# Altium PCB PCIE x1 MXM 3.1 Riser Basic.PCBDOC
Units mm, origin at the board's own origin, x right, y up, seen from the top; angles counter-clockwise.
Board outline 100.1 x 100.1 mm, 4 copper layers (TopLayer, InternalPlane1, InternalPlane2, BottomLayer); 3 components, 21 nets, 323 pads, 0 vias.
Unrouted connection lines stored in the file: 14.
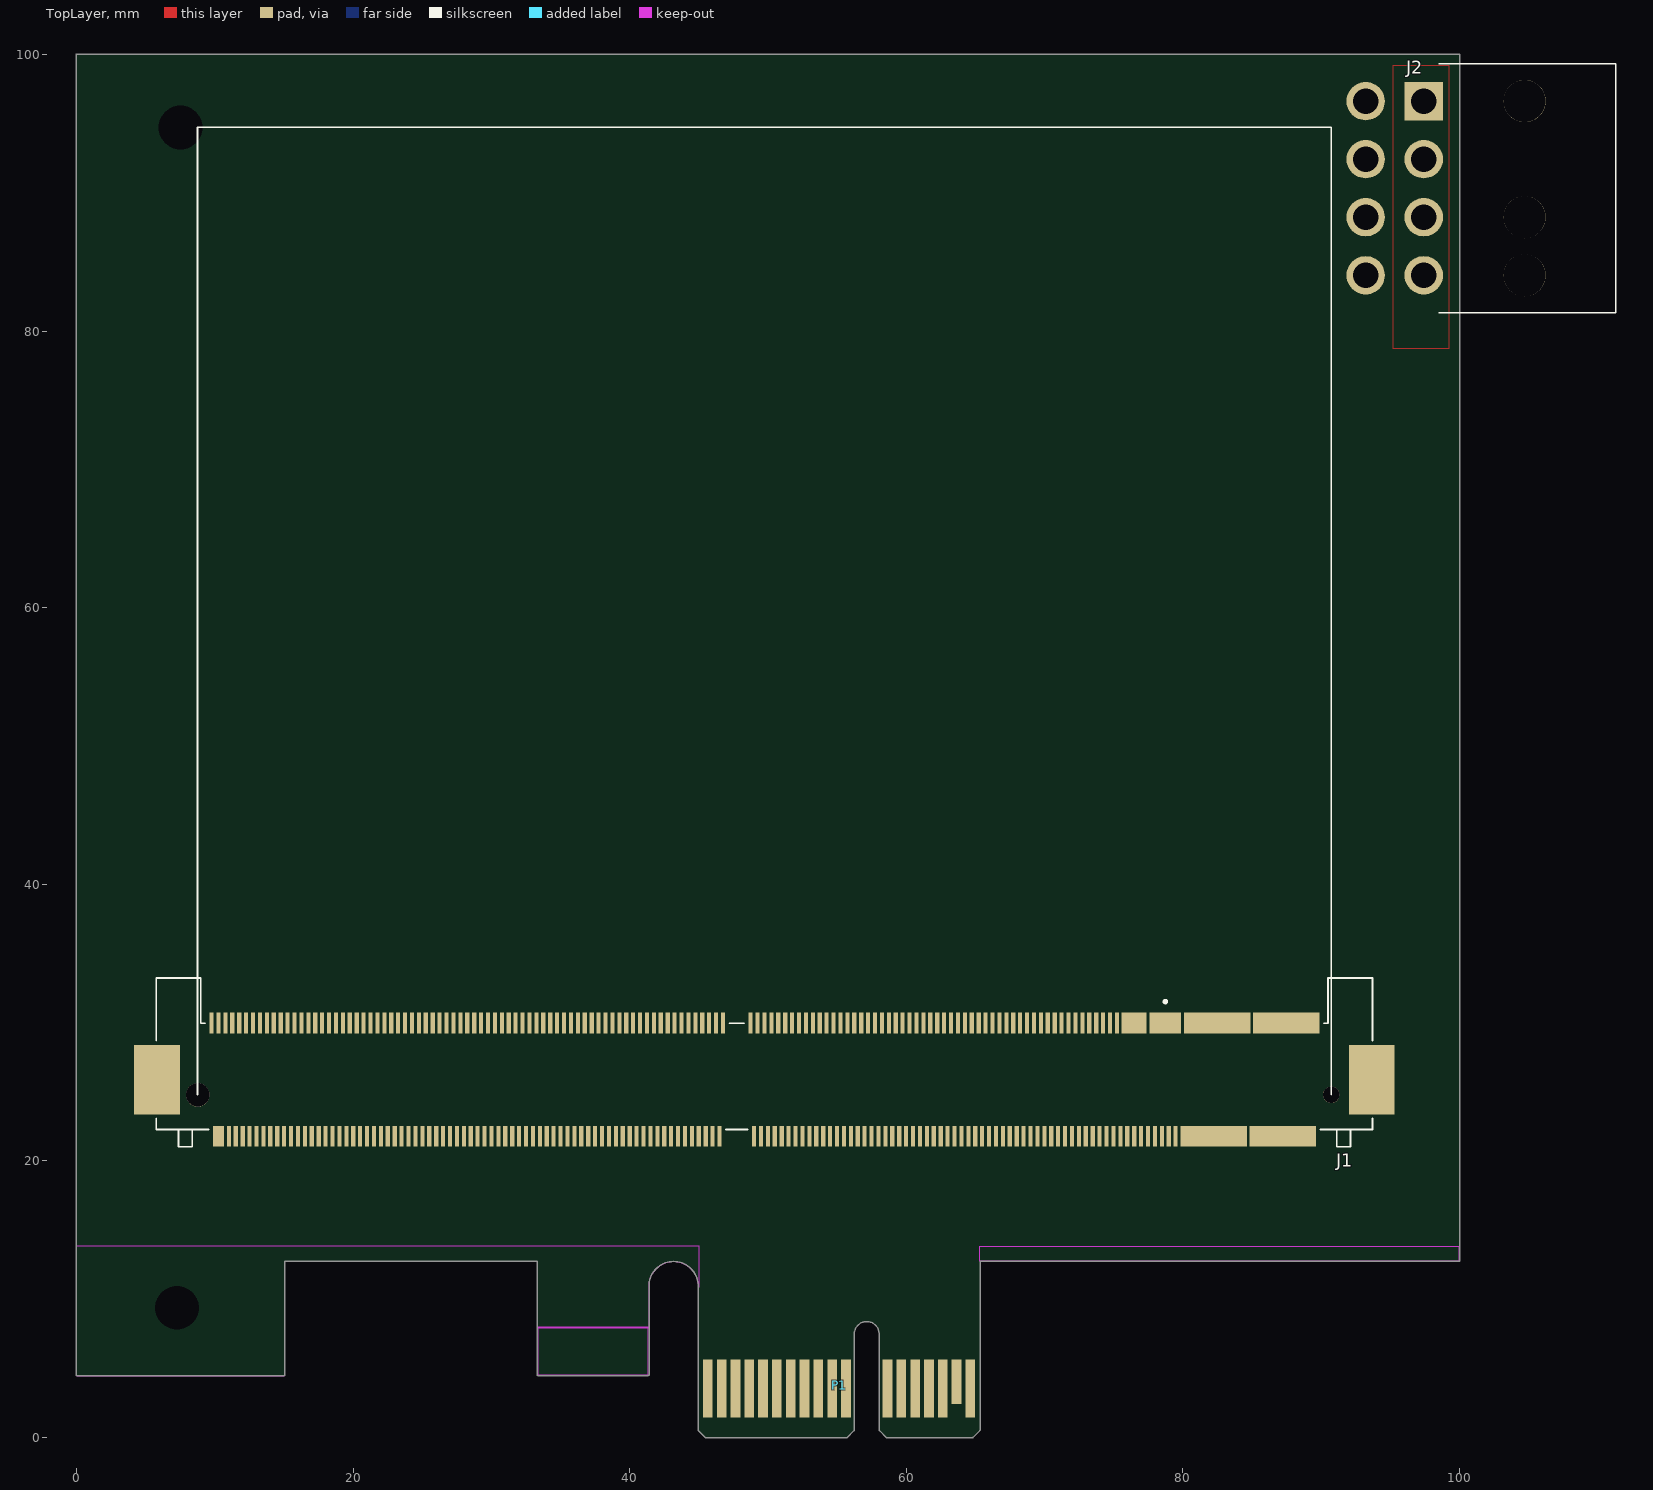
[diagram p0: TopLayer view]
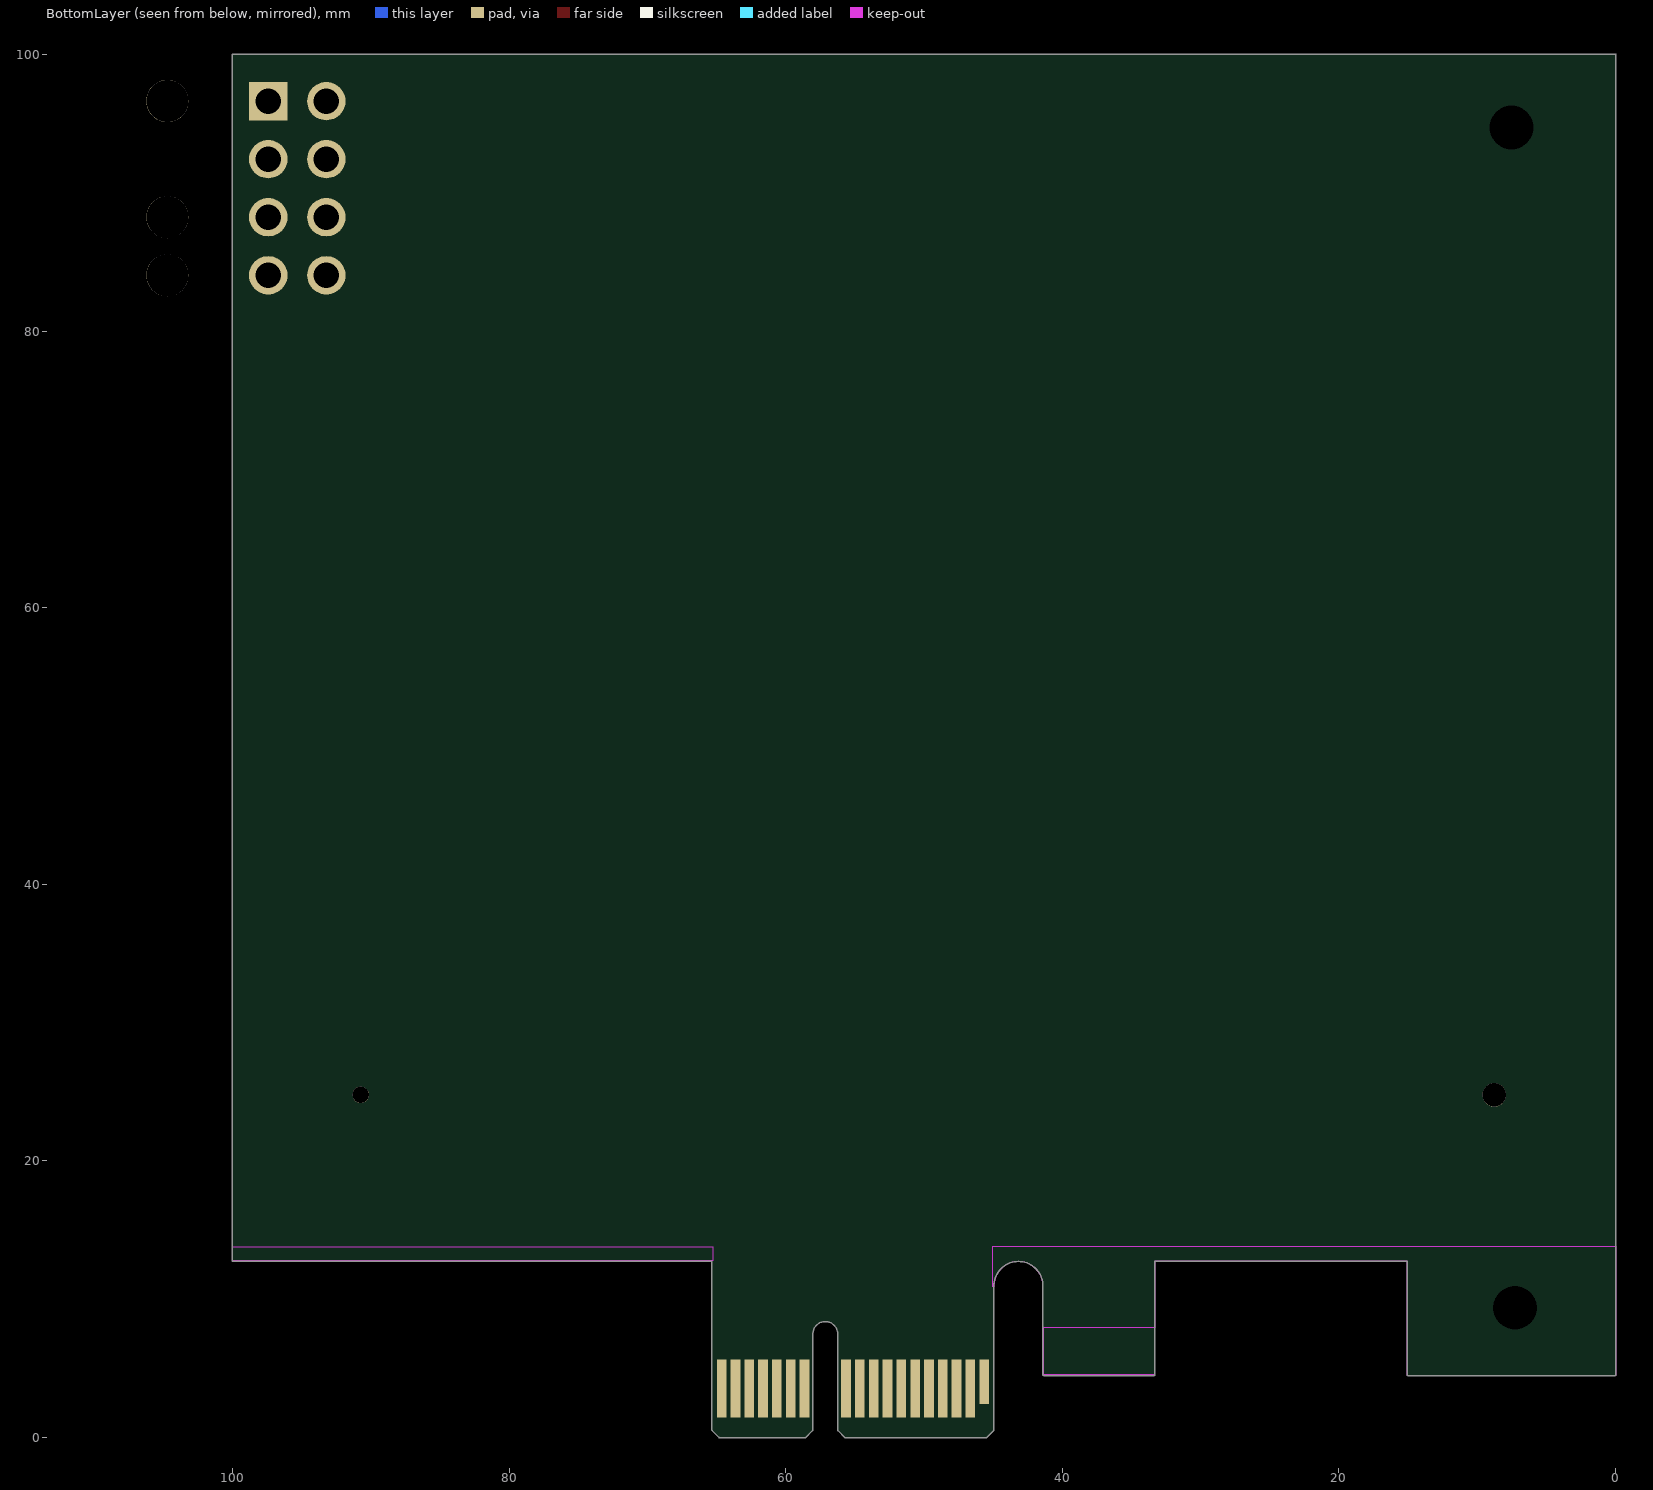
[diagram p1: BottomLayer view, seen from below]
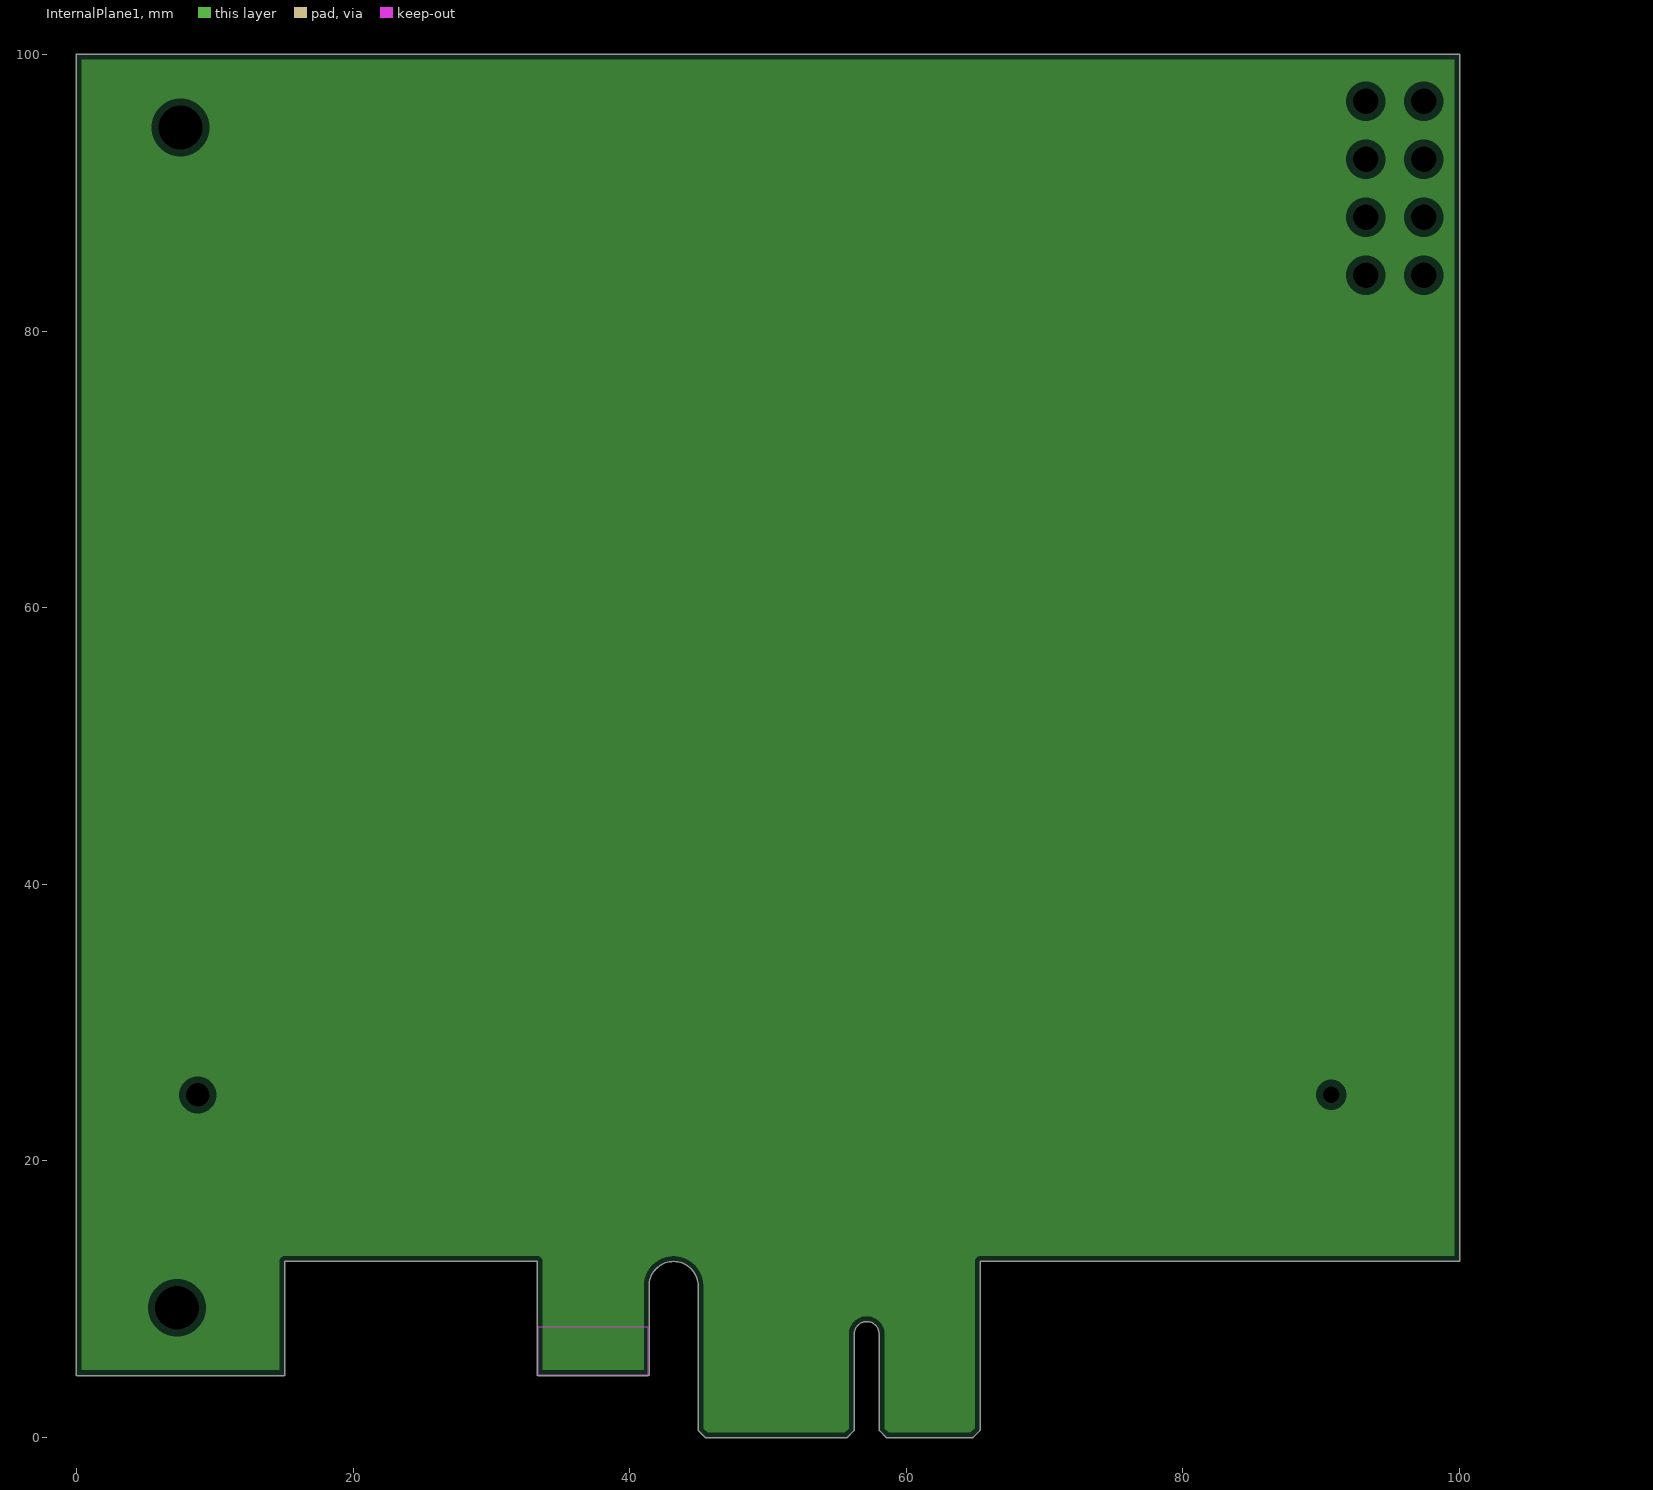
[diagram p2: InternalPlane1, clearances drawn from the general rule]
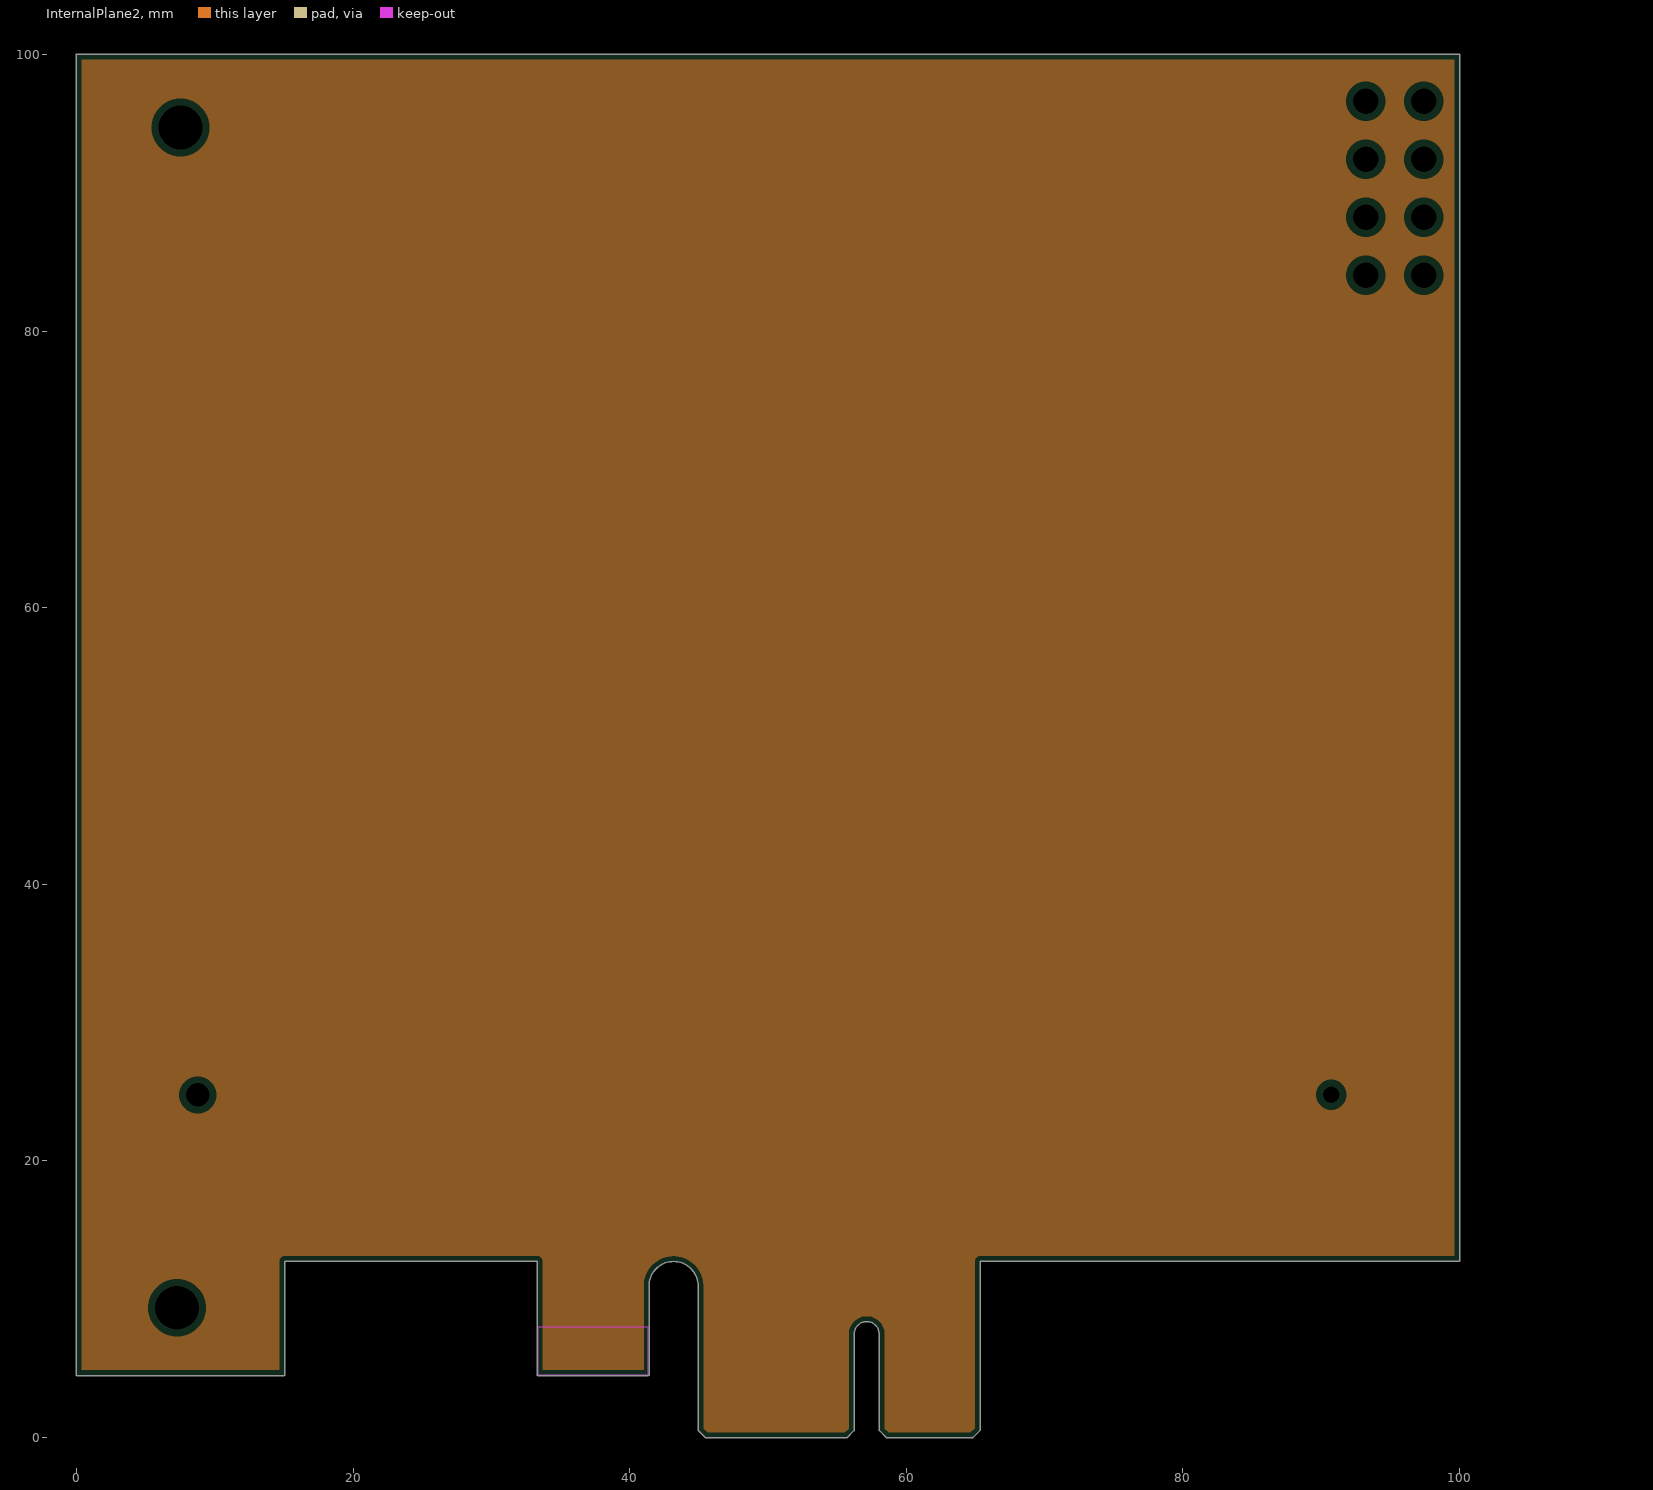
[diagram p3: InternalPlane2, clearances drawn from the general rule]

## Layer stack, top to bottom
TopSolder: solder mask 0.0102, Solder Resist, Dk 3.5
TopLayer: signal copper 0.0178
Dielectric1: core 0.32, FR-4, Dk 4.8
InternalPlane1: plane copper 0.0356
Dielectric2: prepreg 0.32, FR-4, Dk 4.8
InternalPlane2: plane copper 0.0356
Dielectric3: core 0.32, FR-4, Dk 4.8
BottomLayer: signal copper 0.0178
BottomSolder: solder mask 0.0102, Solder Resist, Dk 3.5

## Board outline
0,4.45 15,4.45 ccw(c15,4.5) 15.05,4.5 15.05,12.7 33.3,12.7 33.3,4.5 ccw(c33.35,4.5) 33.35,4.45 41.35,4.45 ccw(c41.35,4.5) 41.4,4.5 41.4,10.925 ccw(c41.35,10.925) 41.4,10.925 cw(c43.175,10.925) 44.95,10.925 ccw(c45,10.925) 44.95,10.924 44.95,0.5 ccw(c45,0.5) 44.965,0.464 44.964,0.464 45.464,-0.036 45.464,-0.035 ccw(c45.5,0) 45.5,-0.05 55.7,-0.05 ccw(c55.7,0) 55.736,-0.035 55.736,-0.036 56.236,0.464 56.235,0.464 ccw(c56.2,0.5) 56.25,0.5 56.25,7.45 cw(c57.15,7.45) 58.05,7.45 58.05,0.5 ccw(c58.1,0.5) 58.065,0.464 58.064,0.464 58.564,-0.036 58.564,-0.035 ccw(c58.6,0) 58.6,-0.05 64.8,-0.05 ccw(c64.8,0) 64.836,-0.035 64.836,-0.036 65.336,0.464 65.335,0.464 ccw(c65.3,0.5) 65.35,0.5 65.35,12.7 100,12.7 ccw(c100,12.75) 100.05,12.75 100.05,100 ccw(c100,100) 100,100.05 0,100.05 ccw(c0,100) -0.05,100 -0.05,4.5 ccw(c0,4.5)

## Design rules (kind name [scope] priority, off if disabled: settings)
Clearance [All] p1: gap=0.254 ignorepadtopadclearanceinfootprint=FALSE except(0: Arc-Hole Track-Hole SMDPad-Hole THPad-Hole Via-Hole Fill-Hole Poly-Hole Region-Hole Text-Hole)
DiffPairsRouting [All] p1: maxlimit=0.254 minlimit=0.254 mostfreqgap=0.254 toplayer_minwidth=0.381 toplayer_maxwidth=0.381 toplayer_prefwidth=0.381 bottomlayer_minwidth=0.381 bottomlayer_maxwidth=0.381 bottomlayer_prefwidth=0.381 maxuncoupledlength=12.7
FabricationTestPointUsage TestPointUsage [All] p1: valid=0 allowmultiple=FALSE
FabricationTestpoint Testpoint [All] p1: side=3 testpointundercomponent=TRUE minsize=1.016 maxsize=2.54 preferedsize=1.524 minholesize=0.508 maxholesize=1.016 preferedholesize=0.813 testpointgrid=0.025 allowsidetop=TRUE allowsidebottom=TRUE usegrid=TRUE gridtolerance=0
Height "PCI Express, Page 84, \"Component Height Constraints\" for solder side" [OnBottomLayer] p1: minheight=0 maxheight=2.67 prefheight=2.67
Height "PCI Express, Page 84, \"Component Height Constraints\" for component side" [OnTopLayer] p2: minheight=0 maxheight=14.47 prefheight=14.47
PlaneClearance [All] p1: clearance=0.5
PlaneConnect [All] p1: planeconnectstyle=Relief reliefexpansion=0.508 reliefentries=4 reliefconductorwidth=0.254 reliefairgap=0.254
PolygonConnect [All] p1: connectstyle=Relief reliefconductorwidth=0.254 reliefentries=4 polygonreliefangle="90 Angle" airgapwidth=0.254
RoutingVias [All] p1: holewidth=0.711 width=1.27 viastyle="Through Hole" minholewidth=0.711 minwidth=1.27 maxholewidth=0.711 maxwidth=1.27
SilkToSolderMaskClearance SilkscreenOverComponentPads [IsPad] p1: minsilkscreentomaskgap=0.254 clearancetoexposedcopper=TRUE
SolderMaskExpansion [All] p1: expansion=0 istentingtop=FALSE
Width [All] p1: maxlimit=0.254 minlimit=0.254 preferedwidth=0.254
23 further rules are at their usual default settings.

## Classes and differential pairs
component class U_CON_PCI_Express_X1_36PIN: P1
net class JTAG[1..5]: JTAG1 JTAG2 JTAG3 JTAG4 JTAG5
component class "Edge Connector": P1
differential pair PER0: +PER0_P -PER0_N
differential pair PET0: +PET0_P -PET0_N

## Components (designator, comment, footprint, x,y, rotation, side; value= is the part's Value field where it differs from the comment)
J1 "Comment" JAE_MM70-314-310B1-2-R300 47.75,24.75 r180 top
J2 "Comment" Molex_45586-8-Pin-PWR 101.963,90.325 r270 top
P1 "PCIeX1-GF-2D-1000-1K-O36" PCIeX1-GF-2D-1000-1K-O36 55.15,3.5 r0 top locked

## Footprints (in the part's own frame and the unit in brackets; to place one, negate y for a bottom-side part, rotate by r counter-clockwise, add the part's x,y. Pads: shape width x height; smd on the part's side, far side on the other; paste and mask are expansions set on the pad)
JAE_MM70-314-310B1-2-R300 [mm]
  rect 2.3x1.5 smd: 1(-31,-5.2)
  rect 0.3x1.5 smd: 2(-31.75,3) 4(-31.25,3) 6(-30.75,3) 8(-30.25,3) 10(-29.75,3) 12(-29.25,3) 14(-28.75,3) 16(-28.25,3) 18(-27.75,3) 19(-27.5,-5.2) 20(-27.25,3) 21(-27,-5.2) 22(-26.75,3) 23(-26.5,-5.2) 24(-26.25,3) 25(-26,-5.2) 26(-25.75,3) 27(-25.5,-5.2) 28(-25.25,3) 29(-25,-5.2) 30(-24.75,3) 31(-24.5,-5.2) 32(-24.25,3) 33(-24,-5.2) 34(-23.75,3) 35(-23.5,-5.2) 36(-23.25,3) 37(-23,-5.2) 38(-22.75,3) 39(-22.5,-5.2) 40(-22.25,3) 41(-22,-5.2) 42(-21.75,3) 43(-21.5,-5.2) 44(-21.25,3) 45(-21,-5.2) 46(-20.75,3) 47(-20.5,-5.2) 48(-20.25,3) 49(-20,-5.2) 50(-19.75,3) 51(-19.5,-5.2) 52(-19.25,3) 53(-19,-5.2) 54(-18.75,3) 55(-18.5,-5.2) 56(-18.25,3) 57(-18,-5.2) 58(-17.75,3) 59(-17.5,-5.2) 60(-17.25,3) 61(-17,-5.2) 62(-16.75,3) 63(-16.5,-5.2) 64(-16.25,3) 65(-16,-5.2) 66(-15.75,3) 67(-15.5,-5.2) 68(-15.25,3) 69(-15,-5.2) 70(-14.75,3) 71(-14.5,-5.2) 72(-14.25,3) 73(-14,-5.2) 74(-13.75,3) 75(-13.5,-5.2) 76(-13.25,3) 77(-13,-5.2) 78(-12.75,3) 79(-12.5,-5.2) 80(-12.25,3) 81(-12,-5.2) 82(-11.75,3) 83(-11.5,-5.2) 84(-11.25,3) 85(-11,-5.2) 86(-10.75,3) 87(-10.5,-5.2) 88(-10.25,3) 89(-10,-5.2) 90(-9.75,3) 91(-9.5,-5.2) 92(-9.25,3) 93(-9,-5.2) 94(-8.75,3) 95(-8.5,-5.2) 96(-8.25,3) 97(-8,-5.2) 98(-7.75,3) 99(-7.5,-5.2) 100(-7.25,3) 101(-7,-5.2) 102(-6.75,3) 103(-6.5,-5.2) 104(-6.25,3) 105(-6,-5.2) 106(-5.75,3) 107(-5.5,-5.2) 108(-5.25,3) 109(-5,-5.2) 110(-4.75,3) 111(-4.5,-5.2) 112(-4.25,3) 113(-4,-5.2) 114(-3.75,3) 115(-3.5,-5.2) 116(-3.25,3) 117(-3,-5.2) 118(-2.75,3) 119(-2.5,-5.2) 120(-2.25,3) 121(-2,-5.2) 122(-1.75,3) 123(-1.5,-5.2) 124(-1.25,3) 125(-1,-5.2) 133(1,-5.2) 134(1.25,3) 135(1.5,-5.2) 136(1.75,3) 137(2,-5.2) 138(2.25,3) 139(2.5,-5.2) 140(2.75,3) 141(3,-5.2) 142(3.25,3) 143(3.5,-5.2) 144(3.75,3) 145(4,-5.2) 146(4.25,3) 147(4.5,-5.2) 148(4.75,3) 149(5,-5.2) 150(5.25,3) 151(5.5,-5.2) 152(5.75,3) 153(6,-5.2) 154(6.25,3) 155(6.5,-5.2) 156(6.75,3) 157(7,-5.2) 158(7.25,3) 159(7.5,-5.2) 160(7.75,3) 161(8,-5.2) 162(8.25,3) 163(8.5,-5.2) 164(8.75,3) 165(9,-5.2) 166(9.25,3) 167(9.5,-5.2) 168(9.75,3) 169(10,-5.2) 170(10.25,3) 171(10.5,-5.2) 172(10.75,3) 173(11,-5.2) 174(11.25,3) 175(11.5,-5.2) 176(11.75,3) 177(12,-5.2) 178(12.25,3) 179(12.5,-5.2) 180(12.75,3) 181(13,-5.2) 182(13.25,3) 183(13.5,-5.2) 184(13.75,3) 185(14,-5.2) 186(14.25,3) 187(14.5,-5.2) 188(14.75,3) 189(15,-5.2) 190(15.25,3) 191(15.5,-5.2) 192(15.75,3) 193(16,-5.2) 194(16.25,3) 195(16.5,-5.2) 196(16.75,3) 197(17,-5.2) 198(17.25,3) 199(17.5,-5.2) 200(17.75,3) 201(18,-5.2) 202(18.25,3) 203(18.5,-5.2) 204(18.75,3) 205(19,-5.2) 206(19.25,3) 207(19.5,-5.2) 208(19.75,3) 209(20,-5.2) 210(20.25,3) 211(20.5,-5.2) 212(20.75,3) 213(21,-5.2) 214(21.25,3) 215(21.5,-5.2) 216(21.75,3) 217(22,-5.2) 218(22.25,3) 219(22.5,-5.2) 220(22.75,3) 221(23,-5.2) 222(23.25,3) 223(23.5,-5.2) 224(23.75,3) 225(24,-5.2) 226(24.25,3) 227(24.5,-5.2) 228(24.75,3) 229(25,-5.2) 230(25.25,3) 231(25.5,-5.2) 232(25.75,3) 233(26,-5.2) 234(26.25,3) 235(26.5,-5.2) 236(26.75,3) 237(27,-5.2) 238(27.25,3) 239(27.5,-5.2) 240(27.75,3) 241(28,-5.2) 242(28.25,3) 243(28.5,-5.2) 244(28.75,3) 245(29,-5.2) 246(29.25,3) 247(29.5,-5.2) 248(29.75,3) 249(30,-5.2) 250(30.25,3) 251(30.5,-5.2) 252(30.75,3) 253(31,-5.2) 254(31.25,3) 255(31.5,-5.2) 256(31.75,3) 257(32,-5.2) 258(32.25,3) 259(32.5,-5.2) 260(32.75,3) 261(33,-5.2) 262(33.25,3) 263(33.5,-5.2) 264(33.75,3) 265(34,-5.2) 266(34.25,3) 267(34.5,-5.2) 268(34.75,3) 269(35,-5.2) 270(35.25,3) 271(35.5,-5.2) 272(35.75,3) 273(36,-5.2) 274(36.25,3) 275(36.5,-5.2) 276(36.75,3) 277(37,-5.2) 279(37.5,-5.2) 281(38,-5.2)
  rect 1.8x1.5 smd: 11(-28.75,-5.2)
  rect 0.8x1.5 smd: 278(37.5,3)
  rect 4.8x1.5 smd: E1(-39.75,-5.2) E2(-39.5,3) E3(-34.75,-5.2) E4(-34.5,3)
  rect 3.3x5 smd: S1(-45.95,-1.1) S2(41.95,-1.1)
  round 1.2 hole 1.2 unplated: ""(-43,0)
  round 1.7 hole 1.7 unplated: ""(39,0)
  silkscreen extent -46,-8.45 42,3.75
Molex_45586-8-Pin-PWR [mm]
  rect 2.775x2.775 hole 1.85: 1(-6.325,-4.513)
  round 2.775 hole 1.85: 2(-2.125,-4.513) 3(2.075,-4.513) 4(6.275,-4.513) 5(-6.325,-8.713) 6(-2.125,-8.713) 7(2.075,-8.713) 8(6.275,-8.713)
  round 3.05 hole 3.05: ""(-6.325,2.787) ""(2.075,2.787) ""(6.275,2.787)
  silkscreen extent -9.02,-3.41 8.98,9.39, body extent -9.41,-9.24 8.99,9.4, height 12.2
PCIeX1-GF-2D-1000-1K-O36 [mm] "Golden finger, PCIeX1, Dual, Opposite, Pitch 1mm, 36-Position"
  rect 0.7x3.2 smd far side paste-1: A1(-9.5,0.5)
  rect 0.7x4.2 smd far side paste-1: A2(-8.5,0) A3(-7.5,0) A4(-6.5,0) A5(-5.5,0) A6(-4.5,0) A7(-3.5,0) A8(-2.5,0) A9(-1.5,0) A10(-0.5,0) A11(0.5,0) A12(3.5,0) A13(4.5,0) A14(5.5,0) A15(6.5,0) A16(7.5,0) A17(8.5,0) A18(9.5,0)
  rect 0.7x4.2 smd paste-1: B1(-9.5,0) B2(-8.5,0) B3(-7.5,0) B4(-6.5,0) B5(-5.5,0) B6(-4.5,0) B7(-3.5,0) B8(-2.5,0) B9(-1.5,0) B10(-0.5,0) B11(0.5,0) B12(3.5,0) B13(4.5,0) B14(5.5,0) B15(6.5,0) B16(7.5,0) B18(9.5,0)
  rect 0.7x3.2 smd paste-1: B17(8.5,0.5)

## Part data
P1: library part CMP-0001-00030-2, "Golden finger, PCIeX1, Dual, Opposite, Pitch 1mm, 36-Position"

## Free pads (board coordinates)
  round 2.88 hole 3.18 unplated: MH1(7.25,9.35) MH2(7.5,94.75)

## Nets (pads, with @x,y where several pads share a name; then routed paths per layer and width w, separated by ;. In a path a pad name is that pad's centre, name@x,y a point inside that pad or via, vN(x,y) a via of type N, cw(c..) or ccw(c..) an arc to the next point about the centre after c; other vN are vias at no path point)
3.3VAUX: P1.B10
+3.3V: P1.A9 P1.A10 P1.B8
+12V: P1.A2 P1.A3 P1.B1 P1.B2 P1.B3
GND: P1.A4 P1.A12 P1.A15 P1.A18 P1.B4 P1.B7 P1.B13 P1.B16 P1.B18
JTAG1: P1.B9
JTAG2: P1.A5
JTAG3: P1.A6
JTAG4: P1.A7
JTAG5: P1.A8
PER0_N: P1.A17
PER0_P: P1.A16
PERST#: P1.A11
PET0_N: P1.B15
PET0_P: P1.B14
PRSNT1#: P1.A1
PRSNT2#: P1.B17
REFCLK+: P1.A13
REFCLK-: P1.A14
SMCLK: P1.B5
SMDAT: P1.B6
WAKE#: P1.B11
pads on no net: J1. J1.1 J1.2 J1.4 J1.6 J1.8 J1.10 J1.11 J1.12 J1.14 J1.16 J1.18 J1.19 J1.20 J1.21 J1.22 J1.23 J1.24 J1.25 J1.26 J1.27 J1.28 J1.29 J1.30 J1.31 J1.32 J1.33 J1.34 J1.35 J1.36 J1.37 J1.38 J1.39 J1.40 J1.41 J1.42 J1.43 J1.44 J1.45 J1.46 J1.47 J1.48 J1.49 J1.50 J1.51 J1.52 J1.53 J1.54 J1.55 J1.56 J1.57 J1.58 J1.59 J1.60 J1.61 J1.62 J1.63 J1.64 J1.65 J1.66 J1.67 J1.68 J1.69 J1.70 J1.71 J1.72 J1.73 J1.74 J1.75 J1.76 J1.77 J1.78 J1.79 J1.80 J1.81 J1.82 J1.83 J1.84 J1.85 J1.86 J1.87 J1.88 J1.89 J1.90 J1.91 J1.92 J1.93 J1.94 J1.95 J1.96 J1.97 J1.98 J1.99 J1.100 J1.101 J1.102 J1.103 J1.104 J1.105 J1.106 J1.107 J1.108 J1.109 J1.110 J1.111 J1.112 J1.113 J1.114 J1.115 J1.116 J1.117 J1.118 J1.119 J1.120 J1.121 J1.122 J1.123 J1.124 J1.125 J1.133 J1.134 J1.135 J1.136 J1.137 J1.138 J1.139 J1.140 J1.141 J1.142 J1.143 J1.144 J1.145 J1.146 J1.147 J1.148 J1.149 J1.150 J1.151 J1.152 J1.153 J1.154 J1.155 J1.156 J1.157 J1.158 J1.159 J1.160 J1.161 J1.162 J1.163 J1.164 J1.165 J1.166 J1.167 J1.168 J1.169 J1.170 J1.171 J1.172 J1.173 J1.174 J1.175 J1.176 J1.177 J1.178 J1.179 J1.180 J1.181 J1.182 J1.183 J1.184 J1.185 J1.186 J1.187 J1.188 J1.189 J1.190 J1.191 J1.192 J1.193 J1.194 J1.195 J1.196 J1.197 J1.198 J1.199 J1.200 J1.201 J1.202 J1.203 J1.204 J1.205 J1.206 J1.207 J1.208 J1.209 J1.210 J1.211 J1.212 J1.213 J1.214 J1.215 J1.216 J1.217 J1.218 J1.219 J1.220 J1.221 J1.222 J1.223 J1.224 J1.225 J1.226 J1.227 J1.228 J1.229 J1.230 J1.231 J1.232 J1.233 J1.234 J1.235 J1.236 J1.237 J1.238 J1.239 J1.240 J1.241 J1.242 J1.243 J1.244 J1.245 J1.246 J1.247 J1.248 J1.249 J1.250 J1.251 J1.252 J1.253 J1.254 J1.255 J1.256 J1.257 J1.258 J1.259 J1.260 J1.261 J1.262 J1.263 J1.264 J1.265 J1.266 J1.267 J1.268 J1.269 J1.270 J1.271 J1.272 J1.273 J1.274 J1.275 J1.276 J1.277 J1.278 J1.279 J1.281 J1.E1 J1.E2 J1.E3 J1.E4 J1.S1 J1.S2 J2. J2.1 J2.2 J2.3 J2.4 J2.5 J2.6 J2.7 J2.8 P1.B12

## Polygon pours and split planes (outlines as drawn)
+12V on TopLayer "+12V_L01_P000" (solid, pour order 0): 95.25,99.25 99.25,99.25 99.25,78.75 95.25,78.75
no net on InternalPlane1 (split plane): 99.668,13.082 65.35,13.082 65.276,13.075 65.204,13.053 65.138,13.018 65.08,12.97 65.032,12.912 64.997,12.846 64.975,12.774 64.968,12.7 64.968,0.638 64.662,0.332 58.738,0.332 58.432,0.638 58.432,7.45 58.433,7.45 58.425,7.594 58.4,7.735 58.361,7.874 58.306,8.007 58.236,8.132 58.153,8.25 58.057,8.357 57.95,8.453 57.832,8.536 57.707,8.606 57.574,8.661 57.435,8.7 57.294,8.725 57.15,8.733 57.006,8.725 56.865,8.7 56.726,8.661 56.593,8.606 56.468,8.536 56.35,8.453 56.243,8.357 56.147,8.25 56.064,8.132 55.994,8.007 55.939,7.874 55.9,7.735 55.875,7.594 55.867,7.45 55.868,7.45 55.868,0.638 55.562,0.332 45.638,0.332 45.332,0.638 45.332,10.924 45.332,10.925 45.361,10.925 45.359,10.929 45.333,10.928 45.324,11.113 45.3,11.3 45.259,11.483 45.203,11.663 45.131,11.837 45.044,12.004 44.942,12.163 44.828,12.312 44.701,12.451 44.562,12.578 44.413,12.692 44.254,12.794 44.087,12.881 43.913,12.953 43.733,13.009 43.55,13.05 43.363,13.074 43.175,13.083 42.987,13.074 42.8,13.05 42.617,13.009 42.437,12.953 42.263,12.881 42.096,12.794 41.937,12.692 41.788,12.578 41.649,12.451 41.522,12.312 41.408,12.163 41.306,12.004 41.219,11.837 41.147,11.663 41.091,11.483 41.05,11.3 41.026,11.113 41.017,10.926 41.018,10.926 41.018,10.925 40.989,10.925 40.991,10.921 41.018,10.922 41.018,4.832 33.682,4.832 33.682,12.7 33.675,12.774 33.653,12.846 33.618,12.912 33.57,12.97 33.512,13.018 33.446,13.053 33.374,13.075 33.3,13.082 15.05,13.082 14.976,13.075 14.904,13.053 14.838,13.018 14.78,12.97 14.732,12.912 14.697,12.846 14.675,12.774 14.668,12.7 14.668,4.832 0.332,4.832 0.332,99.668 99.668,99.668
no net on InternalPlane2 (split plane): 99.668,13.082 65.35,13.082 65.276,13.075 65.204,13.053 65.138,13.018 65.08,12.97 65.032,12.912 64.997,12.846 64.975,12.774 64.968,12.7 64.968,0.638 64.662,0.332 58.738,0.332 58.432,0.638 58.432,7.45 58.433,7.45 58.425,7.594 58.4,7.735 58.361,7.874 58.306,8.007 58.236,8.132 58.153,8.25 58.057,8.357 57.95,8.453 57.832,8.536 57.707,8.606 57.574,8.661 57.435,8.7 57.294,8.725 57.15,8.733 57.006,8.725 56.865,8.7 56.726,8.661 56.593,8.606 56.468,8.536 56.35,8.453 56.243,8.357 56.147,8.25 56.064,8.132 55.994,8.007 55.939,7.874 55.9,7.735 55.875,7.594 55.867,7.45 55.868,7.45 55.868,0.638 55.562,0.332 45.638,0.332 45.332,0.638 45.332,10.924 45.332,10.925 45.361,10.925 45.359,10.929 45.333,10.928 45.324,11.113 45.3,11.3 45.259,11.483 45.203,11.663 45.131,11.837 45.044,12.004 44.942,12.163 44.828,12.312 44.701,12.451 44.562,12.578 44.413,12.692 44.254,12.794 44.087,12.881 43.913,12.953 43.733,13.009 43.55,13.05 43.363,13.074 43.175,13.083 42.987,13.074 42.8,13.05 42.617,13.009 42.437,12.953 42.263,12.881 42.096,12.794 41.937,12.692 41.788,12.578 41.649,12.451 41.522,12.312 41.408,12.163 41.306,12.004 41.219,11.837 41.147,11.663 41.091,11.483 41.05,11.3 41.026,11.113 41.017,10.926 41.018,10.926 41.018,10.925 40.989,10.925 40.991,10.921 41.018,10.922 41.018,4.832 33.682,4.832 33.682,12.7 33.675,12.774 33.653,12.846 33.618,12.912 33.57,12.97 33.512,13.018 33.446,13.053 33.374,13.075 33.3,13.082 15.05,13.082 14.976,13.075 14.904,13.053 14.838,13.018 14.78,12.97 14.732,12.912 14.697,12.846 14.675,12.774 14.668,12.7 14.668,4.832 0.332,4.832 0.332,99.668 99.668,99.668

## Keep-outs
TopLayer:
  rectangle: 65.3,12.75 100,13.75
  region: 0,4.45 15,4.45 ccw(c15,4.5) 15.05,4.5 15.05,12.7 33.3,12.7 33.3,7.95 ccw(c33.35,7.95) 33.35,7.9 41.35,7.9 ccw(c41.35,7.95) 41.4,7.95 ccw(c41.35,7.95) 41.4,7.951 41.4,10.925 cw(c43.175,10.925) 44.95,10.925 ccw(c45,10.925) 45.05,10.925 45.05,13.75 ccw(c45,13.75) 45,13.8 0,13.8 ccw(c0,13.75) -0.05,13.75 -0.05,4.5 ccw(c0,4.5)
BottomLayer:
  rectangle: 65.3,12.75 100,13.75
  region: 0,4.45 15,4.45 ccw(c15,4.5) 15.05,4.5 15.05,12.7 33.3,12.7 33.3,7.95 ccw(c33.35,7.95) 33.35,7.9 41.35,7.9 ccw(c41.35,7.95) 41.4,7.95 ccw(c41.35,7.95) 41.4,7.951 41.4,10.925 cw(c43.175,10.925) 44.95,10.925 ccw(c45,10.925) 45.05,10.925 45.05,13.75 ccw(c45,13.75) 45,13.8 0,13.8 ccw(c0,13.75) -0.05,13.75 -0.05,4.5 ccw(c0,4.5)
TopSolder:
  rectangle: 33.35,4.5 41.35,7.95
BottomSolder:
  rectangle: 33.35,4.5 41.35,7.95
KeepOutLayer:
  rectangle: 33.35,4.5 41.35,7.95

## Silkscreen, mask and mechanical layers (free items; w line width, h text height)
TopOverlay:
  lines w0.12: 8.729,24.758 8.729,94.758 ; 8.754,94.758 90.746,94.758 90.746,24.758
PCI-SIG Outline:
  lines w0.1: 0,4.5 0,100 100,100 100,12.75 65.3,12.75 65.3,0.5 64.8,0 58.6,0 58.1,0.5 58.1,7.45 ccw(c57.15,7.45) 56.2,7.45 56.2,0.5 55.7,0 45.5,0 45,0.5 45,10.925 ccw(c43.175,10.925) 41.35,10.925 41.35,4.5 33.35,4.5 33.35,12.75 15,12.75 15,4.5 0,4.5
Mechanical7:
  lines w0.1: 0,4.5 0,13.75 45,13.75 45,10.925 ccw(c43.175,10.925) 41.35,10.925 41.35,7.95 33.35,7.95 33.35,12.75 15,12.75 15,4.5 0,4.5
DrillDrawing:
  text ".LEGEND" at 225.25,59.352 h1
  text "Drilling Details." at 225.25,57.523 h1

## Dimensions
0,0 to 0,100 on PCI-SIG Dimensions
0,4.5 to 0,100 on PCI-SIG Dimensions
0,100 to 100,100 on PCI-SIG Dimensions

## Text inside footprints (layer, text, board x,y; h text height)
J2: PCI-SIG Notes "45586-0005" at 100.312,92.484 h0.95